# Altium PCB AtmegaDevBoard.PcbDoc
Units mm, origin at the board's own origin, x right, y up, seen from the top; angles counter-clockwise.
Board outline 40 x 23 mm, 2 copper layers (Top Layer, Bottom Layer); 9 components, 23 nets, 68 pads, 13 vias.
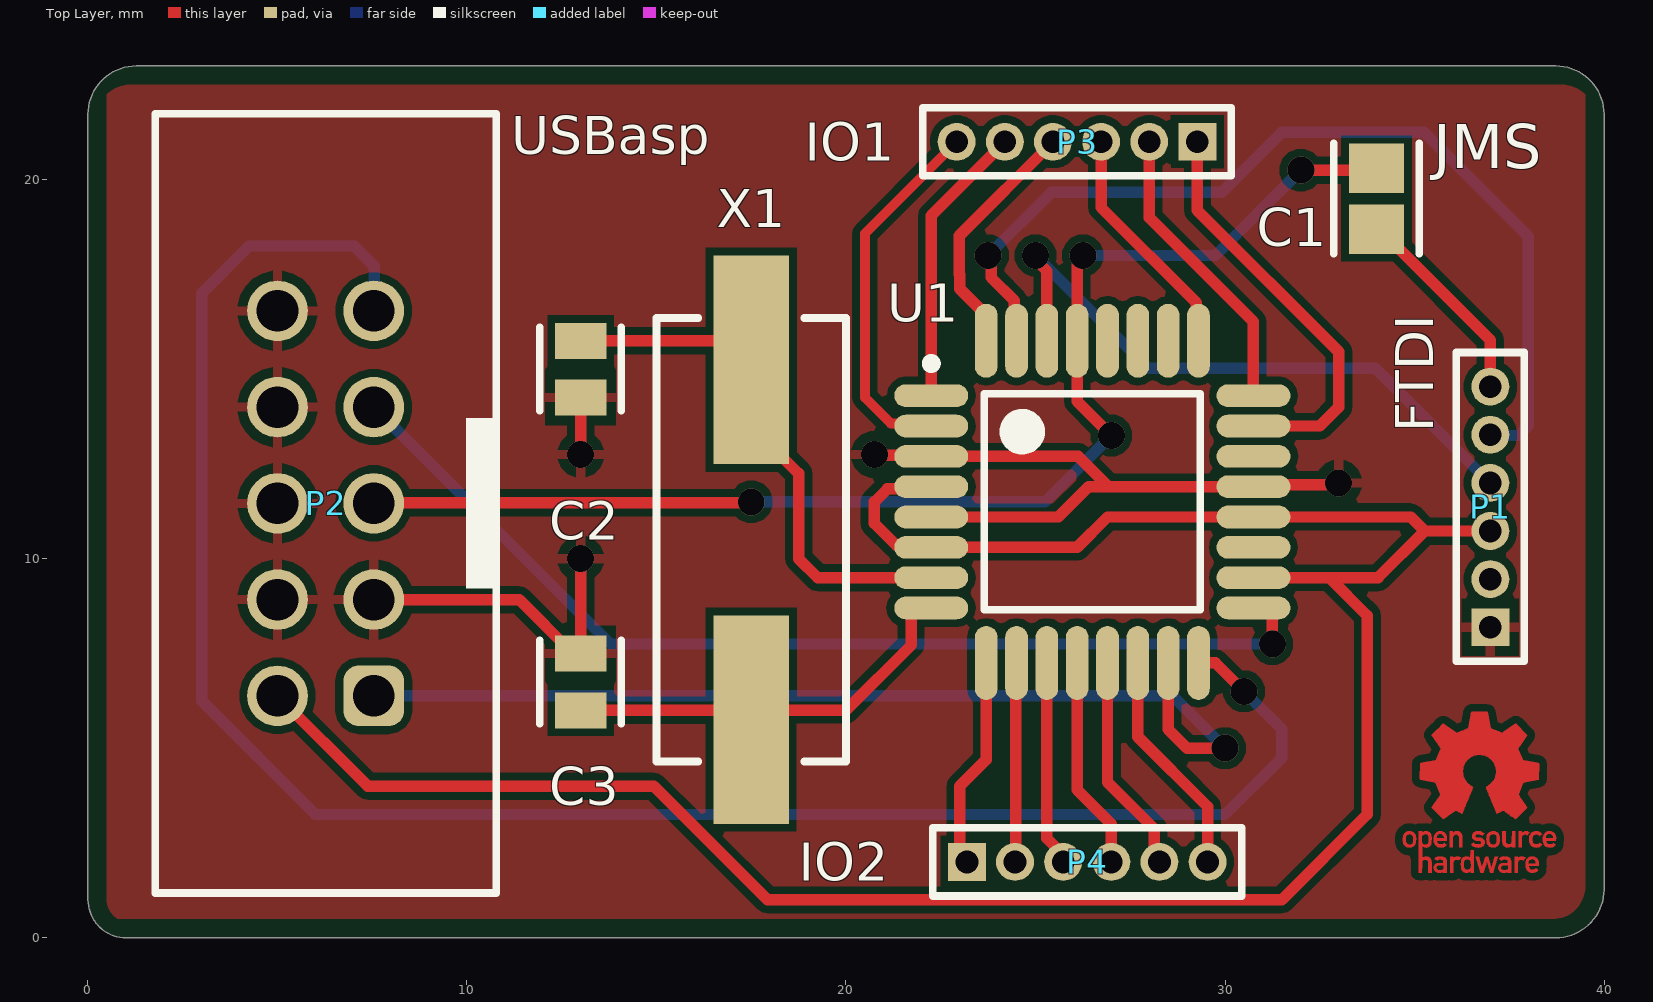
[diagram p0: Top Layer view]
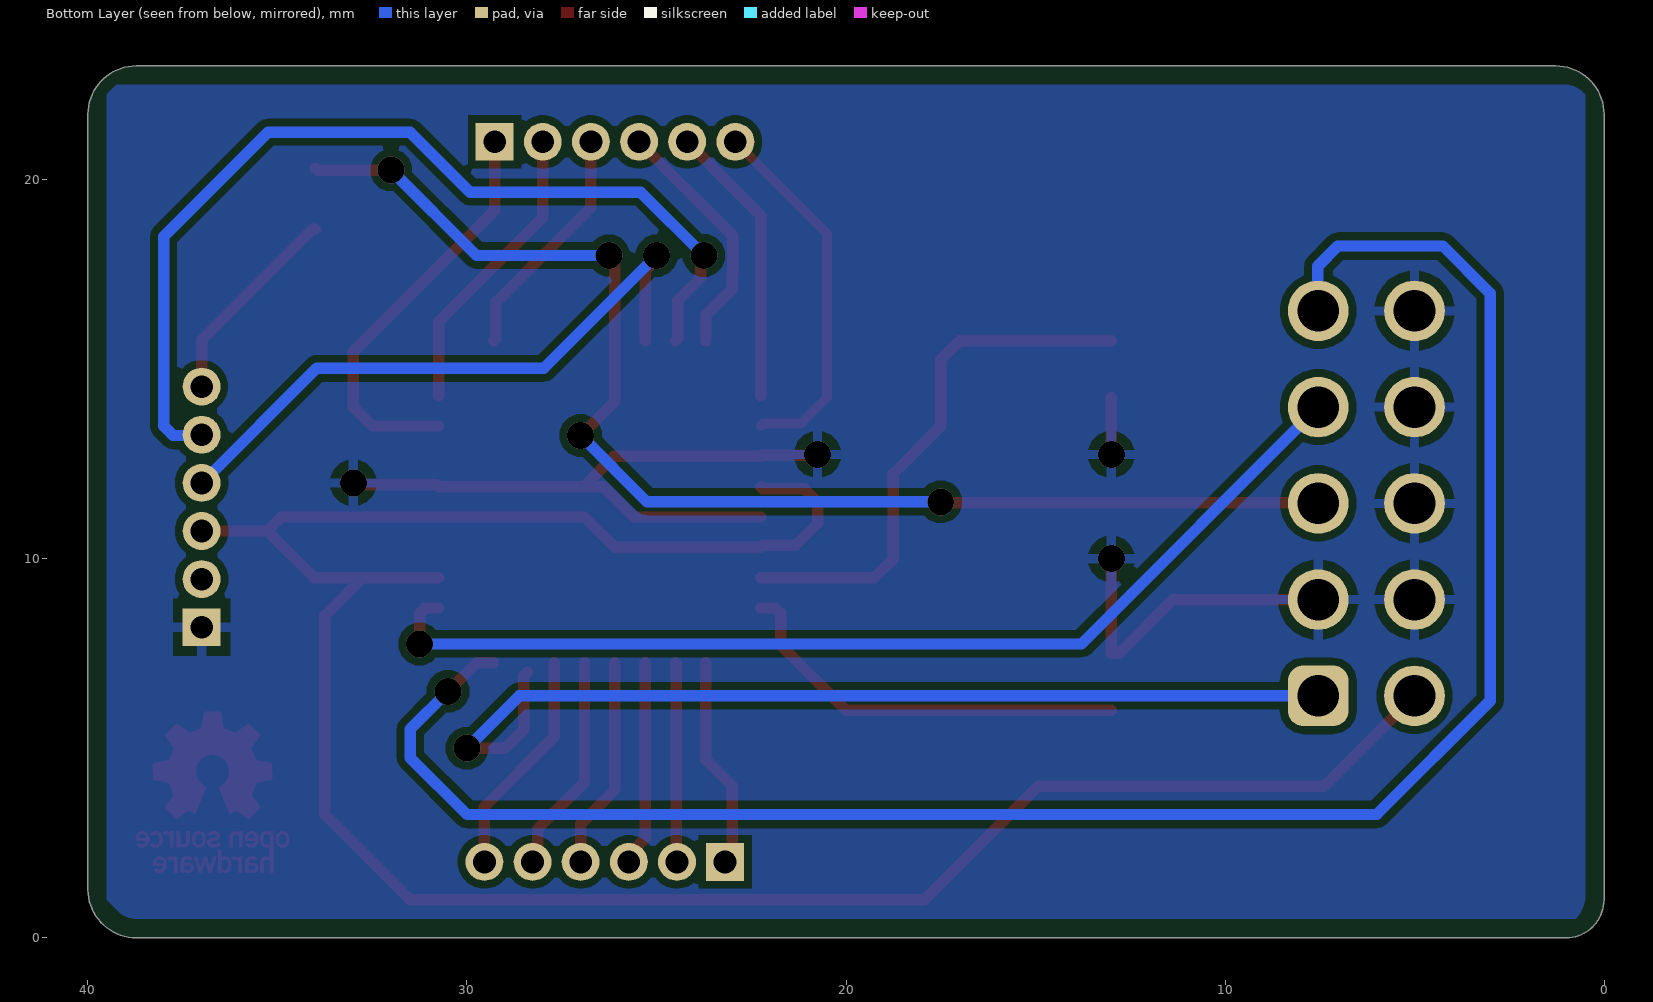
[diagram p1: Bottom Layer view, seen from below]

## Layer stack, top to bottom
Top Solder: solder mask 0.0102, Solder Resist, Dk 3.5
Top Layer: signal copper 0.0356
Dielectric 1: dielectric 0.32, FR-4, Dk 4.8
Bottom Layer: signal copper 0.0356
Bottom Solder: solder mask 0.0102, Solder Resist, Dk 3.5

## Board outline
0,1 ccw(c1,1) 1,0 38.73,0 ccw(c38.73,1.27) 40,1.27 40,21.73 ccw(c38.73,21.73) 38.73,23 1.27,23 ccw(c1.27,21.73) 0,21.73

## Design rules (kind name [scope] priority, off if disabled: settings)
Clearance [All] p1: gap=0.2 ignorepadtopadclearanceinfootprint=FALSE
PolygonConnect [All] p1: connectstyle=Relief reliefconductorwidth=0.254 reliefentries=4 polygonreliefangle="90 Angle" airgapwidth=0.254
RoutingVias [All] p1: holewidth=0.711 width=1.27 viastyle="Through Hole" minholewidth=0.711 minwidth=1.27 maxholewidth=0.711 maxwidth=1.27
SolderMaskExpansion [All] p1: expansion=0.102 istentingtop=FALSE
Width [All] p1: maxlimit=0.5 minlimit=0.254 preferedwidth=0.3
30 further rules are at their usual default settings.

## Components (designator, comment, footprint, x,y, rotation, side; value= is the part's Value field where it differs from the comment)
C1 "100n" FP-0805-L_2_01_0_2-W_1_25-IPC_B 34,19.5 r90 top
C2 "22pf" FP-C0805C-DN-MFG 13,15 r270 top value="22 pF"
C3 "22pf" FP-C0805C-DN-MFG 13,6.75 r90 top value="22 pF"
P1 "FTDI" MHDR1X6 37,8.19 r90 top
P2 "USBasp" 61201021621 6.27,11.46 r90 top
P3 "IO1" MHDR1X6 29.27,21 r180 top
P4 "IO2" MHDR1X6 23.19,2 r0 top
U1 "ATmega328P-AU" 32A_M 26.5,11.5 r0 top
X1 "16Mhz" FOX-FOXSDLF160-20_V 17.5,10.5 r90 top

## Footprints (in the part's own frame and the unit in brackets; to place one, negate y for a bottom-side part, rotate by r counter-clockwise, add the part's x,y. Pads: shape width x height; smd on the part's side, far side on the other; paste and mask are expansions set on the pad)
32A_M [mm] "Thin QFP, 32-Leads, Body 7x7mm, Pitch 0.8mm, IPC Low Density"
  oval 1.95x0.6 smd: 1(-4.25,2.8) 2(-4.25,2) 3(-4.25,1.2) 4(-4.25,0.4) 5(-4.25,-0.4) 6(-4.25,-1.2) 7(-4.25,-2) 8(-4.25,-2.8) 17(4.25,-2.8) 18(4.25,-2) 19(4.25,-1.2) 20(4.25,-0.4) 21(4.25,0.4) 22(4.25,1.2) 23(4.25,2) 24(4.25,2.8)
  oval 0.6x1.95 smd: 9(-2.8,-4.25) 10(-2,-4.25) 11(-1.2,-4.25) 12(-0.4,-4.25) 13(0.4,-4.25) 14(1.2,-4.25) 15(2,-4.25) 16(2.8,-4.25) 25(2.8,4.25) 26(2,4.25) 27(1.2,4.25) 28(0.4,4.25) 29(-0.4,4.25) 30(-1.2,4.25) 31(-2,4.25) 32(-2.8,4.25)
  silkscreen extent -4.37,-2.85 2.85,3.77, body extent -3.5,-3.5 3.5,3.5, height 1.2
61201021621 [mm] "10 pins, straight, gold plating"
  rrect50% 1.6x1.6 hole 1.1: 1(-5.08,-1.27)
  round 1.6 hole 1.1: 2(-5.08,1.27) 3(-2.54,-1.27) 4(-2.54,1.27) 5(0,-1.27) 6(0,1.27) 7(2.54,-1.27) 8(2.54,1.27) 9(5.08,-1.27) 10(5.08,1.27)
  silkscreen extent -10.28,-4.5 10.28,4.5, body extent -10.18,-4.42 10.18,4.75, height 9.13
FOX-FOXSDLF160-20_V [mm] "SMD, 2-Leads, Body 5x11.7mm, Height 4.5mm"
  rect 5.5x2 smd: 1(-4.75,0) 2(4.75,0)
  silkscreen extent -5.85,-2.5 5.85,2.5, body extent -5.85,-2.5 5.85,2.5, height 4.5
FP-0805-L_2_01_0_2-W_1_25-IPC_B [mm]
  rect 1.305x1.456 smd paste+0 mask+0: 1(-0.806,0) 2(0.806,0)
  silkscreen extent -1.46,-1.13 1.46,1.13, body extent -1.71,-0.98 1.71,0.98, height 0.25
FP-C0805C-DN-MFG [mm]
  rect 0.95x1.35 smd paste+0 mask+0: 1(-0.75,0) 2(0.75,0)
  silkscreen extent -1.1,-1.07 1.1,1.07, body extent -1.4,-0.85 1.4,0.85, height 0.25
MHDR1X6 [mm] "Connector; Header; 6 Position"
  rect 1x1 hole 0.6: 1(0,0)
  round 1 hole 0.6: 2(1.27,0) 3(2.54,0) 4(3.81,0) 5(5.08,0) 6(6.35,0)
  silkscreen extent -0.9,-0.9 7.25,0.9

## Part data
C1: library part CMP-2007-04174-2, "General Purpose Ceramic Capacitor, 0805, 100nF, 10%, X7R, 15%, 100V", Capacitance=100nF, Case Code (Imperial)=0805, Case Code (Metric)=2012, Dielectric=X7R, Dielectric Material=Ceramic, Max Operating Temperature=125°C, Min Operating Temperature=-55°C, Package Quantity=2000, Tolerance=10%, Voltage=100V, Case/Package=0805, Construction=Flat, Contact Plating=Tin, Depth=1.25mm, Height=1.4mm, Lead Free="Lead Free", Length=2.01mm, Mount="Surface Mount", Number of Pins=2, Packaging="Tape and Reel", Radiation Hardening=No, REACH SVHC="No SVHC", RoHS Compliant=Yes, Series=-, Termination=SMD/SMT, Thickness=0.055inch, Voltage Rating=100V, Voltage Rating (DC)=100V, Width=0.049inch
C2 C3: library part CMP-2007-00048-2, "Capacitor; Ceramic; Cap; 22.0pF; Tol 5%; SMT; Vol-Rtg 50V; C0G; Tape and Reel", Capacitance="22 pF", Manufacturer=KEMET, Manufacturer Part Number=C0805C220J5GACTU, Package=C0805C-DN, Temperature="-55°C to +125°C", Temperature Characteristic=C0G, Temperature Coefficient=30ppm/°C, Temperature Range High=+125°C, Temperature Range Low=-55°C, Tolerance=0.05, Voltage Rating="50 V", Automotive=No, Category=Cap, ComponentLink2Description=Datasheet, ComponentLink2URL=https://content.kemet.com/datasheets/KEM_C1003_C0G_SMD.pdf, Device Class L1="Passive Components", Device Class L2=Capacitors, Device Class L3="Ceramic Capacitors", Digikey Description="Capacitor; Ceramic; Cap; 22.0pF; Tol 5%; SMT; Vol-Rtg 50V; C0G; Tape and Reel", Height=0.88mm, Ipc Land Pattern Name=CAPC200125X78, Lead Free=Yes, Material=Ceramic, Mouser Description="Multilayer Ceramic Capacitors MLCC - SMD/SMT 50volts 22pF C0G 5%", Octopart=https://octopart.com/c0805c220j5gactu-kemet-145470, RoHS=TRUE
P1 P3 P4: library part MHDR1X6, "Header, 6-Pin", LatestRevisionDate=17-Jul-2002, LatestRevisionNote="Re-released for DXP Platform.", Publisher="Altium Limited"
P2: library part CMP-1502-00007-2, Color=Black, Contact Resistance=20mΩ, Current Rating=3A, Flammability Rating="UL94 V-0", Insulation Resistance=1GΩ, Max Operating Temperature=105°C, Min Operating Temperature=-40°C, Operating Supply Voltage=250V, Connector Type="Male Pin", Contact Gender=Male, Contact Material=Copper, Contact Plating=Gold, Gender=Male, Height=8.85mm, Housing Material=PBT, Insulation Material=PBT, Lead Free="Lead Free", Lead Pitch=2.54mm, Length=20.36mm, Mount="Through Hole", NexarPartId=8917783, Number of Contacts=10, Number of Pins=10, Number of Positions=10, Number of Rows=2, Orientation=Vertical, Pitch=2.54mm, REACH SVHC=Unknown, RoHS=Compliant, Row Spacing=2.54mm, Termination=Solder, Voltage Rating=250V, Voltage Rating (DC)=250V, Width=20.36mm
U1: library part CMP-0095-00269-2, "8-bit AVR Microcontroller, 32KB Flash, 1KB EEPROM, 2KB SRAM, 32-pin TQFP, Industrial Grade (-40°C to 85°C)", Code_JEDEC=MS-026-ABA, ComponentLink1Description="Manufacturer URL", ComponentLink1URL=http://www.atmel.com/, ComponentLink2Description="ATmega48A/48PA/88A/88PA/168A/168PA/328/328P Datasheet", ComponentLink2URL=http://www.atmel.com/dyn/resources/prod_documents/doc8271.pdf, ComponentLink3Description="ATmega48A/48PA/88A/88PA/168A/168PA/328/328P Summary", ComponentLink3URL=http://www.atmel.com/dyn/resources/prod_documents/8271S.pdf, DatasheetVersion="revD, May-2011", PackageDescription="32-Lead, 7x7x1.0 mm Body, 0.8mm Lead Pitch, Thin Profile Plastic Quad Flat Package (TQFP)", PackageReference=32A, PackageVersion="revC, Oct-2010", RevisionNote="DatasheetVersion & PackageVersion updated. URLs added."
X1: library part CMP-1749-00001-1, "Resistance Weld SMD Crystal, 16 MHz, +/- 30 ppm, 20 pF, -20 to 70 degC, 2-Pin SMD, RoHS, Tape and Reel", Case\Package=SOT-553-6, Max Operating Temperature="150 degC", Max Supply Voltage="3.3 V", Max Supply Voltage (DC)="6 V", Min Operating Temperature="-55 degC", Min Supply Voltage="1.4 V", Min Supply Voltage (DC)="4 V", Output Current="3 mA", Package Quantity=1, ComponentLink1Description="Manufacturer URL", ComponentLink1URL=http://www.foxonline.com/, ComponentLink2Description=Datasheet, ComponentLink2URL=http://foxonline.com/pdfs/hc49sdlf.pdf, DatasheetVersion=Mar-15, Height="0.55 mm", Interface=I2C, Length="1.6 mm", Mount="Surface Mount", PackageDescription="2-Pin Surface Mount Device, Body 5 x 11.7 mm, Height 4.5 mm", PackageReference=FOX-FOXSDLF160-20, Packaging="Cut Tape", Pins=6, Radiation Hardening=No, REACH SVHC="No SVHC", RoHSCompliant=true, Weight="9.9E-05 oz", Width="1.2 mm"

## Via types
v1: diameter 0.711, hole 0.711, Top Layer to Bottom Layer, 13 vias

## Nets (pads, with @x,y where several pads share a name; then routed paths per layer and width w, separated by ;. In a path a pad name is that pad's centre, name@x,y a point inside that pad or via, vN(x,y) a via of type N, cw(c..) or ccw(c..) an arc to the next point about the centre after c; other vN are vias at no path point)
+5: P1.3 P2.2 U1.4 U1.6 U1.18 U1.20 | length 62.8
  Top Layer w0.3: P2.2 7.38,4 14.929,4 17.929,1 31.5,1 33.75,3.25 33.75,8.5 32.75,9.5 ; U1.4 22.193,11.843 21.093,11.843 20.75,11.5 20.75,10.929 21.322,10.357 22.193,10.357 U1.6 26.1,10.3 26.9,11.1 U1.20 34.9,11.1 35.27,10.73 ; U1.18 32.75,9.5 ; P1.3 35.27,10.73 ; 32.75,9.5 34.04,9.5 35.27,10.73
GND: C2.2 C3.2 P1.1 P2.3 P2.4 P2.6 P2.8 P2.10 U1.3 U1.5 U1.21 | length 27.7
  Top Layer w0.3: P2.3 11.38,8.92 12.8,7.5 C3.2 v1(13,10) ; v1(13,12.75) C2.2 ; v1(20.75,12.75) 20.775,12.725 22.225,12.725 U1.3 26.129,12.7 26.929,11.9 ; U1.5 25.6,11.1 26.4,11.9 26.929,11.9 ; v1(33,12) 32.95,11.95 30.8,11.95 U1.21 26.929,11.9
MISO: P2.9 U1.16 | length 51.3
  Top Layer w0.3: U1.16 29.75,7.25 v1(30.5,6.5)
  Bottom Layer w0.3: P2.9 7.555,16.555 7.555,17.718 7.023,18.25 4.25,18.25 3,17 3,6.25 6,3.25 30,3.25 31.5,4.75 31.5,5.5 v1(30.5,6.5)
MOSI: P2.1 U1.15 | length 26.3
  Top Layer w0.3: U1.15@28.404,7 28.5,6.904 28.5,5.5 29,5 v1(30,5)
  Bottom Layer w0.3: P2.1 28.62,6.38 v1(30,5)
NetC1_1: C1.1 P1.6 | length 5.4
  Top Layer w0.3: C1.1 34.076,18.694 37,15.77 P1.6
NetP3_1: P3.1 U1.23 | length 11
  Top Layer w0.3: P3.1 29.27,19.19 33,15.46 33,14 32.5,13.5 U1.23
NetP3_2: P3.2 U1.24 | length 7.8
  Top Layer w0.3: P3.2 28,19 30.75,16.25 U1.24
NetP3_3: P3.3 U1.25 | length 6.3
  Top Layer w0.3: P3.3 26.73,19.27 29.243,16.757 29.243,15.807 U1.25
NetP3_4: P3.4 U1.32 | length 6.6
  Top Layer w0.3: U1.32 23.7,16.425 23,17.125 23,17.5 22.99,17.51 22.99,18.522 25.46,20.992 P3.4
NetP3_5: P3.5 U1.1 | length 7.6
  Top Layer w0.3: U1.1 22.25,19.052 P3.5@24.198,21 ; P3.5 P3.5@24.198,21 ; P3.5@24.25,21 P3.5@24.198,21
NetP3_6: P3.6 U1.2 | length 9.9
  Top Layer w0.254: U1.2 22.184,13.566 21.184,13.566 20.5,14.25 20.5,18.58 P3.6
  Top Layer w0.3: P3.6@22.92,20.92 P3.6
NetP4_1: P4.1 U1.9 | length 5.6
  Top Layer w0.3: P4.1 23,2.19 23,4 23.7,4.7 U1.9
NetP4_2: P4.2 U1.10 | length 5.3
  Top Layer w0.3: P4.2 24.48,2.02 24.48,7.23 U1.10
NetP4_3: P4.3 U1.11 | length 5.4
  Top Layer w0.3: U1.11 25.3,2.619 25.73,2.189 P4.3
NetP4_4: P4.4 U1.12 | length 5.6
  Top Layer w0.3: U1.12 26.1,3.9 27,3 P4.4
NetP4_5: P4.5 U1.13 | length 5.8
  Top Layer w0.3: U1.13 26.9,4.1 28.136,2.864 28.136,2.134 P4.5
NetP4_6: P4.6 U1.14 | length 6
  Top Layer w0.3: U1.14 27.7,5.3 29.54,3.46 P4.6
R\E\S\E\T\: C1.2 P2.5 U1.29 | length 34.1
  Top Layer w0.3: P2.5 7.56,11.48 17.48,11.48 v1(17.5,11.5) ; v1(26.25,18) 26.25,17.889 26.1,17.739 U1.29 26.1,14.15 v1(27,13.25) ; v1(32,20.25) 33.944,20.25 C1.2
  Bottom Layer w0.3: v1(17.5,11.5) 25.25,11.5 v1(27,13.25) ; v1(26.25,18) 29.75,18 v1(32,20.25)
RX: P1.5 U1.31 | length 25.4
  Top Layer w0.3: v1(23.75,18) 23.829,17.921 23.829,17.421 24.443,16.807 24.443,15.807 U1.31
  Bottom Layer w0.3: v1(23.75,18) 25.414,19.664 29.914,19.664 31.5,21.25 35.25,21.25 38,18.5 38,13.5 37.75,13.25 37.02,13.25 P1.5
SCK: P2.7 U1.17 | length 27.7
  Top Layer w0.3: U1.17 31.111,8.7 31.25,8.561 v1(31.25,7.75)
  Bottom Layer w0.3: P2.7 13.79,7.75 v1(31.25,7.75)
TX: P1.4 U1.30 | length 16.9
  Top Layer w0.3: v1(25,18) 25,17.889 25.3,17.589 U1.30
  Bottom Layer w0.3: v1(25,18) 27.972,15.028 33.964,15.028 36.992,12 P1.4
XTAL1: C2.1 U1.7 X1.2 | length 14.2
  Top Layer w0.3: C2.1 17,15.75 X1.2 17.5,13.5 18.75,12.25 18.75,10 19.25,9.5 U1.7
XTAL2: C3.1 U1.8 X1.1 | length 10.9
  Top Layer w0.3: C3.1 20,6 21.725,7.725 21.725,8.561 21.864,8.7 U1.8
pads on no net: P1.2 U1.19 U1.22 U1.26 U1.27 U1.28

## Polygon pours and split planes (outlines as drawn)
GND on Top Layer "NONET_L-01_P-001" (solid, pour order 3): 0.5,1 ccw(c1.104,1) 0.677,0.573 0.75,0.5 38.646,0.5 ccw(c38.646,1.354) 39.25,0.75 ccw(c38.646,1.354) 39.5,1.354 39.5,22.25 ccw(c38.896,21.646) 38.896,22.5 1.104,22.5 ccw(c1.104,21.646) 0.5,22.25
GND on Bottom Layer "NONET_L-01_P-001" (solid, pour order 5): 0.5,1.104 ccw(c1.354,1.104) 0.75,0.5 38.75,0.5 ccw(c38.75,1.104) 39.177,0.677 39.5,1 39.5,22.25 39.25,22.5 1,22.5 ccw(c1,21.896) 0.573,22.323 0.5,22.25

## Other copper
Top Layer:
  region: 37.72,2.139 37.731,2.138 37.732,2.098 37.752,2.117 37.756,2.12 37.771,2.129 37.796,2.139 37.825,2.144 37.874,2.142 37.886,2.137 37.918,2.12 37.929,2.111 37.919,2.101 37.917,2.096 37.904,2.084 37.902,2.079 37.892,2.07 37.89,2.065 37.88,2.055 37.878,2.05 37.867,2.039 37.862,2.041 37.857,2.046 37.835,2.056 37.818,2.059 37.786,2.056 37.759,2.041 37.743,2.025 37.736,2.008 37.731,1.989 37.729,1.718 37.643,1.72 37.644,2.139 37.717,2.139
  region: 34.908,2.807 34.916,2.805 34.946,2.794 34.971,2.779 34.974,2.775 34.979,2.773 35.005,2.747 35.007,2.742 35.012,2.737 35.015,2.733 35.03,2.701 35.034,2.684 35.037,2.674 35.039,2.649 35.042,2.64 35.039,2.525 35.037,2.517 35.033,2.499 35.031,2.489 35.025,2.473 35.023,2.472 35.009,2.448 35.003,2.439 34.974,2.411 34.97,2.408 34.955,2.399 34.933,2.389 34.916,2.384 34.906,2.381 34.881,2.379 34.825,2.381 34.818,2.384 34.795,2.392 34.774,2.403 34.752,2.421 34.731,2.441 34.729,2.446 34.724,2.451 34.721,2.456 34.704,2.493 34.7,2.509 34.698,2.523 34.696,2.545 34.694,2.642 34.697,2.649 34.699,2.676 34.702,2.684 34.705,2.697 34.713,2.717 34.725,2.736 34.733,2.747 34.736,2.752 34.759,2.775 34.764,2.778 34.781,2.79 34.806,2.8 34.823,2.805 34.833,2.807 34.857,2.81 hole: 34.879,2.724 34.842,2.722 34.811,2.704 34.8,2.693 34.797,2.689 34.785,2.662 34.782,2.645 34.78,2.63 34.78,2.627 34.782,2.534 34.785,2.527 34.791,2.511 34.803,2.492 34.815,2.479 34.82,2.477 34.842,2.467 34.859,2.465 34.896,2.467 34.923,2.482 34.939,2.498 34.949,2.52 34.954,2.539 34.956,2.578 34.954,2.654 34.951,2.662 34.945,2.678 34.933,2.697 34.921,2.709 34.899,2.719
  region: 37.32,2.794 37.321,2.805 37.405,2.804 37.408,2.527 37.41,2.52 37.425,2.493 37.429,2.487 37.433,2.484 37.441,2.477 37.458,2.47 37.475,2.465 37.514,2.467 37.541,2.482 37.555,2.495 37.557,2.5 37.567,2.522 37.569,2.539 37.572,2.571 37.573,2.805 37.657,2.804 37.656,2.384 37.572,2.385 37.57,2.428 37.546,2.403 37.541,2.401 37.504,2.384 37.488,2.38 37.438,2.379 37.431,2.381 37.418,2.385 37.405,2.39 37.397,2.394 37.366,2.415 37.349,2.432 37.347,2.437 37.337,2.451 37.329,2.468 37.322,2.493 37.32,2.517 37.32,2.791
  region: 35.718,2.807 35.726,2.805 35.739,2.801 35.766,2.789 35.786,2.777 35.789,2.773 35.794,2.771 35.817,2.747 35.82,2.742 35.825,2.737 35.827,2.733 35.847,2.691 35.85,2.675 35.853,2.663 35.855,2.633 35.857,2.564 35.592,2.561 35.596,2.533 35.598,2.523 35.603,2.511 35.616,2.492 35.63,2.477 35.635,2.474 35.657,2.465 35.677,2.46 35.723,2.462 35.735,2.467 35.767,2.484 35.772,2.489 35.777,2.492 35.784,2.499 35.789,2.496 35.799,2.487 35.804,2.484 35.816,2.472 35.821,2.47 35.831,2.46 35.836,2.457 35.847,2.446 35.821,2.421 35.816,2.418 35.811,2.413 35.806,2.411 35.792,2.401 35.77,2.391 35.753,2.386 35.733,2.381 35.716,2.379 35.647,2.381 35.64,2.384 35.63,2.386 35.614,2.392 35.602,2.397 35.581,2.411 35.568,2.422 35.548,2.441 35.546,2.446 35.541,2.451 35.524,2.488 35.516,2.512 35.514,2.522 35.512,2.539 35.509,2.549 35.507,2.603 35.51,2.643 35.512,2.645 35.514,2.669 35.516,2.676 35.527,2.707 35.532,2.719 35.549,2.746 35.562,2.761 35.576,2.775 35.581,2.778 35.586,2.783 35.591,2.785 35.628,2.802 35.647,2.807 35.672,2.81 hole: 35.686,2.729 35.657,2.726 35.65,2.724 35.628,2.712 35.623,2.707 35.619,2.706 35.617,2.701 35.609,2.693 35.6,2.671 35.596,2.658 35.593,2.636 35.592,2.635 35.767,2.633 35.768,2.649 35.766,2.657 35.762,2.67 35.757,2.682 35.749,2.696 35.738,2.709 35.723,2.719 35.718,2.722 35.716,2.722 35.704,2.726
  region: 36.194,2.074 36.183,2.061 36.179,2.057 36.177,2.052 36.167,2.043 36.166,2.039 36.129,2.056 36.12,2.059 36.083,2.056 36.056,2.041 36.042,2.028 36.033,2.006 36.028,1.986 36.027,1.718 35.94,1.72 35.941,2.139 36.028,2.138 36.029,2.098 36.046,2.115 36.051,2.117 36.056,2.122 36.061,2.125 36.088,2.137 36.105,2.142 36.122,2.144 36.171,2.142 36.183,2.137 36.215,2.12 36.226,2.111 36.219,2.104 36.216,2.099 36.206,2.089 36.204,2.084 36.195,2.076
  region: 36.827,1.988 36.845,2.045 36.872,2.128 36.876,2.139 36.94,2.138 36.944,2.122 37.028,1.862 37.035,1.846 37.038,1.859 37.043,1.876 37.046,1.886 37.051,1.903 37.053,1.913 37.058,1.93 37.06,1.94 37.065,1.957 37.068,1.967 37.073,1.984 37.075,1.994 37.08,2.011 37.082,2.021 37.087,2.038 37.09,2.047 37.095,2.065 37.097,2.074 37.102,2.092 37.104,2.101 37.114,2.136 37.115,2.139 37.205,2.138 37.202,2.123 37.197,2.111 37.188,2.079 37.077,1.734 37.071,1.718 36.994,1.72 36.992,1.734 36.987,1.747 36.98,1.773 36.958,1.847 36.953,1.864 36.916,1.986 36.907,2.012 36.891,1.959 36.887,1.942 36.843,1.795 36.838,1.778 36.823,1.729 36.819,1.718 36.742,1.72 36.739,1.733 36.706,1.837 36.613,2.128 36.61,2.138 36.699,2.139 36.703,2.126 36.706,2.116 36.71,2.099 36.713,2.089 36.718,2.072 36.72,2.062 36.725,2.045 36.728,2.035 36.732,2.018 36.735,2.008 36.745,1.974 36.747,1.964 36.752,1.947 36.754,1.937 36.759,1.92 36.762,1.91 36.767,1.893 36.769,1.884 36.774,1.866 36.776,1.857 36.78,1.846 36.786,1.862 36.791,1.879 36.818,1.962 36.825,1.986
  region: 35.731,2.142 35.738,2.139 35.754,2.136 35.781,2.126 35.805,2.111 35.825,2.092 35.827,2.087 35.832,2.082 35.842,2.057 35.847,2.038 35.849,2.013 35.848,1.718 35.764,1.72 35.762,1.755 35.756,1.747 35.749,1.739 35.748,1.736 35.743,1.733 35.738,1.728 35.733,1.726 35.731,1.726 35.718,1.721 35.701,1.716 35.677,1.714 35.618,1.716 35.611,1.718 35.597,1.722 35.585,1.727 35.564,1.738 35.551,1.749 35.542,1.755 35.526,1.776 35.516,1.798 35.512,1.817 35.509,1.842 35.512,1.871 35.514,1.879 35.52,1.895 35.535,1.919 35.538,1.923 35.541,1.928 35.547,1.934 35.552,1.936 35.559,1.944 35.564,1.946 35.591,1.958 35.608,1.963 35.642,1.968 35.764,1.969 35.761,2.03 35.749,2.047 35.745,2.051 35.728,2.059 35.711,2.061 35.701,2.063 35.638,2.061 35.625,2.056 35.613,2.049 35.6,2.035 35.598,2.032 35.568,2.055 35.559,2.061 35.554,2.066 35.549,2.068 35.545,2.073 35.54,2.076 35.535,2.081 35.531,2.082 35.534,2.087 35.541,2.094 35.543,2.099 35.552,2.107 35.557,2.11 35.564,2.117 35.569,2.12 35.601,2.134 35.618,2.139 35.635,2.142 35.645,2.144 hole: 35.762,1.897 35.635,1.895 35.628,1.892 35.606,1.88 35.595,1.869 35.591,1.855 35.59,1.84 35.592,1.832 35.602,1.815 35.608,1.809 35.613,1.806 35.63,1.799 35.64,1.797 35.657,1.794 35.723,1.797 35.745,1.809 35.754,1.815 35.759,1.827 35.764,1.857 35.764,1.891 35.764,1.893
  region: 38.282,2.391 38.27,2.386 38.251,2.381 38.226,2.379 38.17,2.381 38.163,2.384 38.145,2.389 38.128,2.396 38.123,2.399 38.106,2.408 38.093,2.419 38.084,2.426 38.068,2.441 38.066,2.446 38.054,2.463 38.051,2.468 38.039,2.495 38.032,2.52 38.027,2.539 38.024,2.571 38.022,2.581 38.024,2.637 38.027,2.645 38.03,2.665 38.033,2.675 38.043,2.702 38.061,2.735 38.072,2.748 38.076,2.752 38.078,2.757 38.084,2.763 38.089,2.766 38.099,2.775 38.104,2.778 38.119,2.788 38.136,2.795 38.148,2.8 38.177,2.807 38.202,2.81 38.253,2.807 38.26,2.805 38.291,2.794 38.312,2.783 38.335,2.767 38.344,2.758 38.349,2.756 38.36,2.745 38.364,2.735 38.353,2.724 38.349,2.722 38.329,2.702 38.324,2.7 38.307,2.682 38.3,2.685 38.285,2.7 38.28,2.702 38.275,2.707 38.248,2.719 38.229,2.724 38.185,2.722 38.172,2.717 38.145,2.702 38.134,2.691 38.132,2.686 38.122,2.671 38.115,2.647 38.112,2.637 38.11,2.62 38.109,2.587 38.111,2.558 38.114,2.543 38.123,2.516 38.136,2.496 38.15,2.482 38.155,2.479 38.177,2.47 38.187,2.467 38.204,2.465 38.246,2.467 38.278,2.484 38.291,2.495 38.302,2.506 38.307,2.504 38.32,2.493 38.334,2.479 38.339,2.477 38.356,2.46 38.361,2.457 38.364,2.454 38.362,2.446 38.341,2.426 38.336,2.423 38.329,2.416 38.324,2.413 38.309,2.403 38.285,2.391
  region: 37.889,2.8 37.913,2.807 37.937,2.81 37.977,2.807 37.984,2.805 37.996,2.8 38.023,2.785 38.028,2.78 38.033,2.778 38.034,2.777 38.024,2.767 38.022,2.762 38.01,2.75 38.007,2.745 37.997,2.735 37.995,2.73 37.985,2.72 37.983,2.715 37.972,2.704 37.967,2.707 37.952,2.717 37.928,2.724 37.891,2.722 37.864,2.707 37.848,2.691 37.841,2.674 37.836,2.654 37.833,2.608 37.832,2.384 37.748,2.385 37.749,2.805 37.833,2.804 37.835,2.761 37.857,2.783 37.862,2.785 37.876,2.795 37.886,2.8
  region: 38.143,2.142 38.15,2.139 38.174,2.131 38.188,2.123 38.208,2.111 38.216,2.105 38.24,2.082 38.242,2.077 38.247,2.072 38.249,2.067 38.269,2.025 38.273,2.01 38.275,1.997 38.278,1.97 38.279,1.898 38.015,1.896 38.018,1.868 38.022,1.854 38.037,1.827 38.052,1.811 38.057,1.809 38.079,1.799 38.099,1.794 38.143,1.797 38.15,1.799 38.163,1.804 38.189,1.819 38.194,1.824 38.199,1.826 38.207,1.833 38.212,1.831 38.219,1.824 38.224,1.821 38.236,1.809 38.241,1.806 38.253,1.794 38.258,1.792 38.269,1.781 38.243,1.755 38.238,1.753 38.234,1.748 38.229,1.745 38.214,1.736 38.197,1.728 38.185,1.723 38.145,1.714 38.143,1.714 38.072,1.716 38.065,1.718 38.051,1.722 38.032,1.729 38.011,1.74 37.989,1.758 37.97,1.776 37.968,1.781 37.958,1.795 37.956,1.8 37.946,1.822 37.939,1.847 37.936,1.857 37.934,1.874 37.931,1.884 37.929,1.937 37.933,1.978 37.935,1.992 37.937,2.005 37.94,2.014 37.95,2.041 37.955,2.054 37.967,2.073 37.977,2.088 38.001,2.112 38.006,2.115 38.021,2.125 38.043,2.134 38.06,2.139 38.07,2.142 38.087,2.144 hole: 38.111,2.063 38.077,2.061 38.05,2.046 38.045,2.041 38.04,2.039 38.032,2.028 38.022,2.006 38.021,2 38.019,1.999 38.017,1.981 38.016,1.968 38.191,1.969 38.188,1.996 38.183,2.008 38.169,2.035 38.155,2.049 38.15,2.051 38.128,2.061
  region: 37.113,2.807 37.12,2.805 37.13,2.802 37.146,2.796 37.179,2.778 37.186,2.771 37.191,2.768 37.205,2.755 37.207,2.75 37.214,2.742 37.217,2.737 37.227,2.723 37.234,2.706 37.239,2.689 37.244,2.669 37.246,2.637 37.249,2.613 37.249,2.561 37.247,2.56 37.245,2.531 37.24,2.504 37.238,2.494 37.23,2.474 37.219,2.454 37.208,2.44 37.196,2.426 37.184,2.413 37.179,2.411 37.162,2.399 37.145,2.391 37.132,2.386 37.119,2.383 37.104,2.38 37.044,2.379 37.037,2.381 37.022,2.384 36.998,2.394 36.976,2.406 36.962,2.417 36.954,2.423 36.943,2.434 36.94,2.439 36.933,2.446 36.931,2.451 36.921,2.466 36.911,2.49 36.909,2.5 36.905,2.516 36.901,2.549 36.899,2.603 36.902,2.656 36.907,2.682 36.912,2.702 36.925,2.729 36.928,2.733 36.931,2.737 36.942,2.751 36.945,2.755 36.948,2.759 36.954,2.766 36.959,2.768 36.969,2.778 36.973,2.78 36.978,2.785 37.01,2.8 37.04,2.807 37.057,2.81 hole: 37.084,2.724 37.049,2.722 37.037,2.717 37.02,2.707 37.015,2.702 37.011,2.701 37.009,2.696 37.004,2.691 37.002,2.686 36.992,2.664 36.989,2.654 36.987,2.63 36.989,2.53 36.994,2.517 37.009,2.49 37.017,2.482 37.022,2.479 37.049,2.467 37.059,2.465 37.064,2.465 37.101,2.467 37.132,2.484 37.143,2.495 37.156,2.522 37.158,2.532 37.161,2.556 37.163,2.61 37.161,2.618 37.158,2.659 37.156,2.667 37.139,2.698 37.132,2.704 37.128,2.707 37.123,2.712 37.11,2.717 37.093,2.722
  region: 37.433,2.142 37.441,2.139 37.457,2.136 37.484,2.126 37.503,2.114 37.512,2.107 37.528,2.092 37.53,2.087 37.545,2.055 37.55,2.035 37.552,2.011 37.551,1.718 37.466,1.72 37.465,1.755 37.462,1.751 37.459,1.747 37.443,1.731 37.421,1.721 37.402,1.716 37.384,1.714 37.318,1.716 37.311,1.718 37.288,1.727 37.279,1.731 37.256,1.747 37.247,1.753 37.239,1.761 37.236,1.766 37.232,1.771 37.232,1.773 37.222,1.788 37.219,1.798 37.217,1.805 37.214,1.815 37.212,1.832 37.214,1.874 37.217,1.881 37.222,1.893 37.234,1.915 37.239,1.92 37.241,1.925 37.255,1.939 37.26,1.941 37.274,1.951 37.292,1.958 37.321,1.966 37.36,1.968 37.466,1.969 37.464,2.028 37.454,2.045 37.448,2.051 37.431,2.059 37.414,2.061 37.404,2.063 37.34,2.061 37.333,2.059 37.316,2.049 37.303,2.035 37.301,2.032 37.296,2.034 37.292,2.039 37.287,2.041 37.279,2.049 37.274,2.051 37.27,2.056 37.265,2.059 37.26,2.063 37.255,2.066 37.25,2.071 37.245,2.073 37.238,2.081 37.234,2.082 37.236,2.087 37.241,2.092 37.244,2.096 37.26,2.112 37.265,2.115 37.279,2.125 37.296,2.132 37.309,2.137 37.325,2.14 37.358,2.144 hole: 37.465,1.897 37.338,1.895 37.331,1.892 37.318,1.887 37.301,1.875 37.295,1.862 37.293,1.852 37.295,1.83 37.307,1.813 37.311,1.809 37.326,1.802 37.328,1.802 37.34,1.797 37.365,1.794 37.426,1.797 37.448,1.809 37.457,1.818 37.462,1.83 37.464,1.84 37.466,1.879
  region: 35.344,2.807 35.368,2.797 35.39,2.785 35.395,2.78 35.4,2.778 35.416,2.762 35.419,2.757 35.426,2.75 35.428,2.745 35.441,2.718 35.445,2.698 35.448,2.674 35.45,2.657 35.448,2.498 35.445,2.49 35.442,2.474 35.439,2.465 35.428,2.444 35.411,2.422 35.395,2.406 35.39,2.403 35.376,2.394 35.359,2.386 35.341,2.381 35.324,2.379 35.306,2.378 35.284,2.38 35.272,2.383 35.252,2.39 35.228,2.405 35.219,2.411 35.206,2.422 35.202,2.426 35.198,2.424 35.198,2.221 35.198,2.219 35.2,2.098 35.212,2.11 35.217,2.112 35.224,2.12 35.229,2.122 35.266,2.139 35.295,2.144 35.344,2.142 35.356,2.137 35.393,2.117 35.398,2.112 35.403,2.11 35.419,2.094 35.421,2.089 35.426,2.084 35.428,2.079 35.443,2.047 35.448,2.028 35.45,2.003 35.449,1.718 35.365,1.72 35.362,1.996 35.36,2.003 35.345,2.03 35.329,2.046 35.312,2.054 35.295,2.059 35.256,2.056 35.229,2.041 35.218,2.03 35.215,2.025 35.211,2.021 35.208,2.011 35.203,1.999 35.201,1.989 35.198,1.942 35.197,1.718 35.113,1.72 35.114,2.805 35.198,2.804 35.2,2.763 35.207,2.771 35.212,2.773 35.222,2.783 35.226,2.785 35.244,2.795 35.261,2.802 35.28,2.807 35.297,2.81 hole: 35.295,2.724 35.253,2.722 35.231,2.709 35.218,2.696 35.208,2.674 35.203,2.654 35.201,2.63 35.203,2.53 35.206,2.522 35.214,2.499 35.218,2.495 35.22,2.49 35.236,2.474 35.248,2.47 35.268,2.465 35.312,2.467 35.334,2.479 35.348,2.493 35.357,2.515 35.362,2.544 35.362,2.547 35.365,2.564 35.362,2.654 35.36,2.662 35.356,2.675 35.351,2.687 35.341,2.702 35.332,2.712 35.315,2.719
  region: 36.564,2.309 36.562,1.718 36.478,1.72 36.477,1.76 36.46,1.743 36.455,1.74 36.44,1.731 36.418,1.721 36.398,1.716 36.381,1.714 36.335,1.716 36.323,1.721 36.313,1.723 36.296,1.733 36.274,1.75 36.255,1.769 36.253,1.773 36.243,1.788 36.236,1.813 36.233,1.822 36.228,1.857 36.226,1.955 36.228,1.994 36.232,2.032 36.235,2.044 36.237,2.054 36.248,2.077 36.265,2.099 36.283,2.117 36.288,2.12 36.293,2.125 36.32,2.137 36.34,2.142 36.357,2.144 36.403,2.142 36.428,2.132 36.433,2.129 36.463,2.109 36.472,2.103 36.474,2.1 36.476,2.099 36.477,2.098 36.479,2.311 hole: 36.398,2.059 36.367,2.056 36.345,2.044 36.329,2.028 36.324,2.016 36.319,1.999 36.316,1.989 36.314,1.964 36.315,1.877 36.316,1.876 36.319,1.854 36.324,1.842 36.334,1.825 36.35,1.809 36.362,1.804 36.372,1.802 36.389,1.799 36.423,1.802 36.45,1.816 36.458,1.825 36.461,1.83 36.471,1.852 36.473,1.862 36.478,1.896 36.476,1.989 36.473,1.996 36.469,2.01 36.465,2.022 36.455,2.036 36.445,2.046 36.423,2.056
  region: 36.027,2.775 36.051,2.793 36.056,2.795 36.073,2.802 36.093,2.807 36.11,2.81 36.154,2.807 36.161,2.805 36.177,2.799 36.189,2.794 36.193,2.79 36.21,2.78 36.236,2.755 36.238,2.75 36.248,2.735 36.253,2.723 36.26,2.698 36.263,2.681 36.265,2.642 36.264,2.384 36.177,2.385 36.175,2.664 36.172,2.671 36.16,2.693 36.151,2.704 36.146,2.707 36.142,2.712 36.124,2.719 36.105,2.724 36.071,2.722 36.044,2.707 36.039,2.702 36.035,2.701 36.033,2.696 36.028,2.691 36.018,2.669 36.013,2.649 36.012,2.384 35.925,2.385 35.926,2.805 36.013,2.804 36.014,2.761 36.02,2.769 36.025,2.774
  region: 36.533,2.739 36.545,2.758 36.565,2.778 36.57,2.78 36.575,2.785 36.602,2.797 36.619,2.802 36.638,2.807 36.663,2.81 36.729,2.807 36.736,2.805 36.746,2.802 36.759,2.799 36.779,2.791 36.791,2.786 36.816,2.772 36.83,2.762 36.834,2.758 36.839,2.756 36.843,2.752 36.838,2.747 36.835,2.742 36.825,2.733 36.823,2.728 36.811,2.715 36.808,2.711 36.796,2.698 36.794,2.693 36.79,2.69 36.773,2.702 36.736,2.719 36.719,2.724 36.709,2.726 36.677,2.729 36.643,2.726 36.621,2.714 36.61,2.703 36.605,2.684 36.608,2.667 36.619,2.653 36.641,2.643 36.65,2.641 36.697,2.638 36.707,2.636 36.751,2.633 36.758,2.631 36.772,2.627 36.791,2.62 36.806,2.61 36.814,2.604 36.83,2.588 36.833,2.583 36.847,2.552 36.852,2.522 36.85,2.478 36.845,2.466 36.83,2.439 36.823,2.432 36.821,2.427 36.814,2.421 36.81,2.418 36.802,2.411 36.761,2.391 36.743,2.386 36.724,2.381 36.699,2.379 36.676,2.378 36.644,2.38 36.617,2.385 36.605,2.388 36.578,2.397 36.565,2.403 36.538,2.418 36.507,2.441 36.499,2.448 36.493,2.454 36.495,2.459 36.511,2.474 36.516,2.477 36.55,2.511 36.562,2.504 36.572,2.494 36.577,2.492 36.594,2.479 36.619,2.47 36.636,2.465 36.646,2.462 36.67,2.46 36.719,2.462 36.726,2.465 36.753,2.479 36.757,2.483 36.759,2.488 36.767,2.505 36.764,2.53 36.759,2.534 36.757,2.539 36.753,2.543 36.741,2.548 36.721,2.553 36.649,2.559 36.63,2.561 36.615,2.564 36.588,2.574 36.567,2.585 36.562,2.589 36.557,2.592 36.542,2.608 36.539,2.613 36.529,2.627 36.527,2.637 36.524,2.645 36.522,2.654 36.52,2.671 36.522,2.713 36.532,2.737
  region: 38.598,2.807 38.605,2.805 38.636,2.794 38.66,2.779 38.669,2.773 38.683,2.762 38.695,2.75 38.697,2.745 38.702,2.74 38.705,2.735 38.714,2.72 38.722,2.703 38.729,2.679 38.731,2.669 38.734,2.645 38.733,2.563 38.472,2.561 38.475,2.534 38.477,2.527 38.483,2.511 38.495,2.492 38.499,2.488 38.501,2.483 38.51,2.477 38.537,2.465 38.556,2.46 38.603,2.462 38.615,2.467 38.647,2.484 38.654,2.492 38.659,2.494 38.664,2.499 38.669,2.496 38.681,2.484 38.686,2.482 38.698,2.47 38.703,2.467 38.716,2.455 38.72,2.452 38.727,2.446 38.703,2.423 38.698,2.421 38.691,2.413 38.686,2.411 38.671,2.401 38.654,2.394 38.642,2.389 38.613,2.381 38.588,2.379 38.527,2.381 38.52,2.384 38.51,2.386 38.487,2.395 38.473,2.401 38.472,2.402 38.468,2.406 38.464,2.408 38.45,2.419 38.441,2.426 38.435,2.432 38.433,2.437 38.426,2.444 38.423,2.449 38.413,2.463 38.404,2.485 38.396,2.51 38.394,2.52 38.389,2.549 38.386,2.581 38.389,2.647 38.391,2.654 38.397,2.68 38.4,2.69 38.41,2.714 38.421,2.735 38.438,2.757 38.459,2.778 38.464,2.78 38.478,2.79 38.5,2.8 38.517,2.805 38.527,2.807 38.552,2.81 hole: 38.571,2.729 38.534,2.726 38.508,2.712 38.501,2.708 38.5,2.707 38.497,2.703 38.494,2.698 38.489,2.693 38.479,2.671 38.475,2.652 38.473,2.633 38.648,2.635 38.645,2.66 38.642,2.67 38.631,2.693 38.626,2.698 38.624,2.703 38.618,2.709 38.613,2.712 38.608,2.717 38.591,2.724
  region: 614 vertices and 0 holes, not listed, extent 35.145,3.13 38.286,5.959

## Silkscreen, mask and mechanical layers (free items; w line width, h text height)
Top Overlay:
  text "JMS" at 35.5,19.921 h2
Mechanical 1:
  the board outline again, w0.254